# EAGLE board eCVT 507 rev0 (EAGLE 9.5.0)
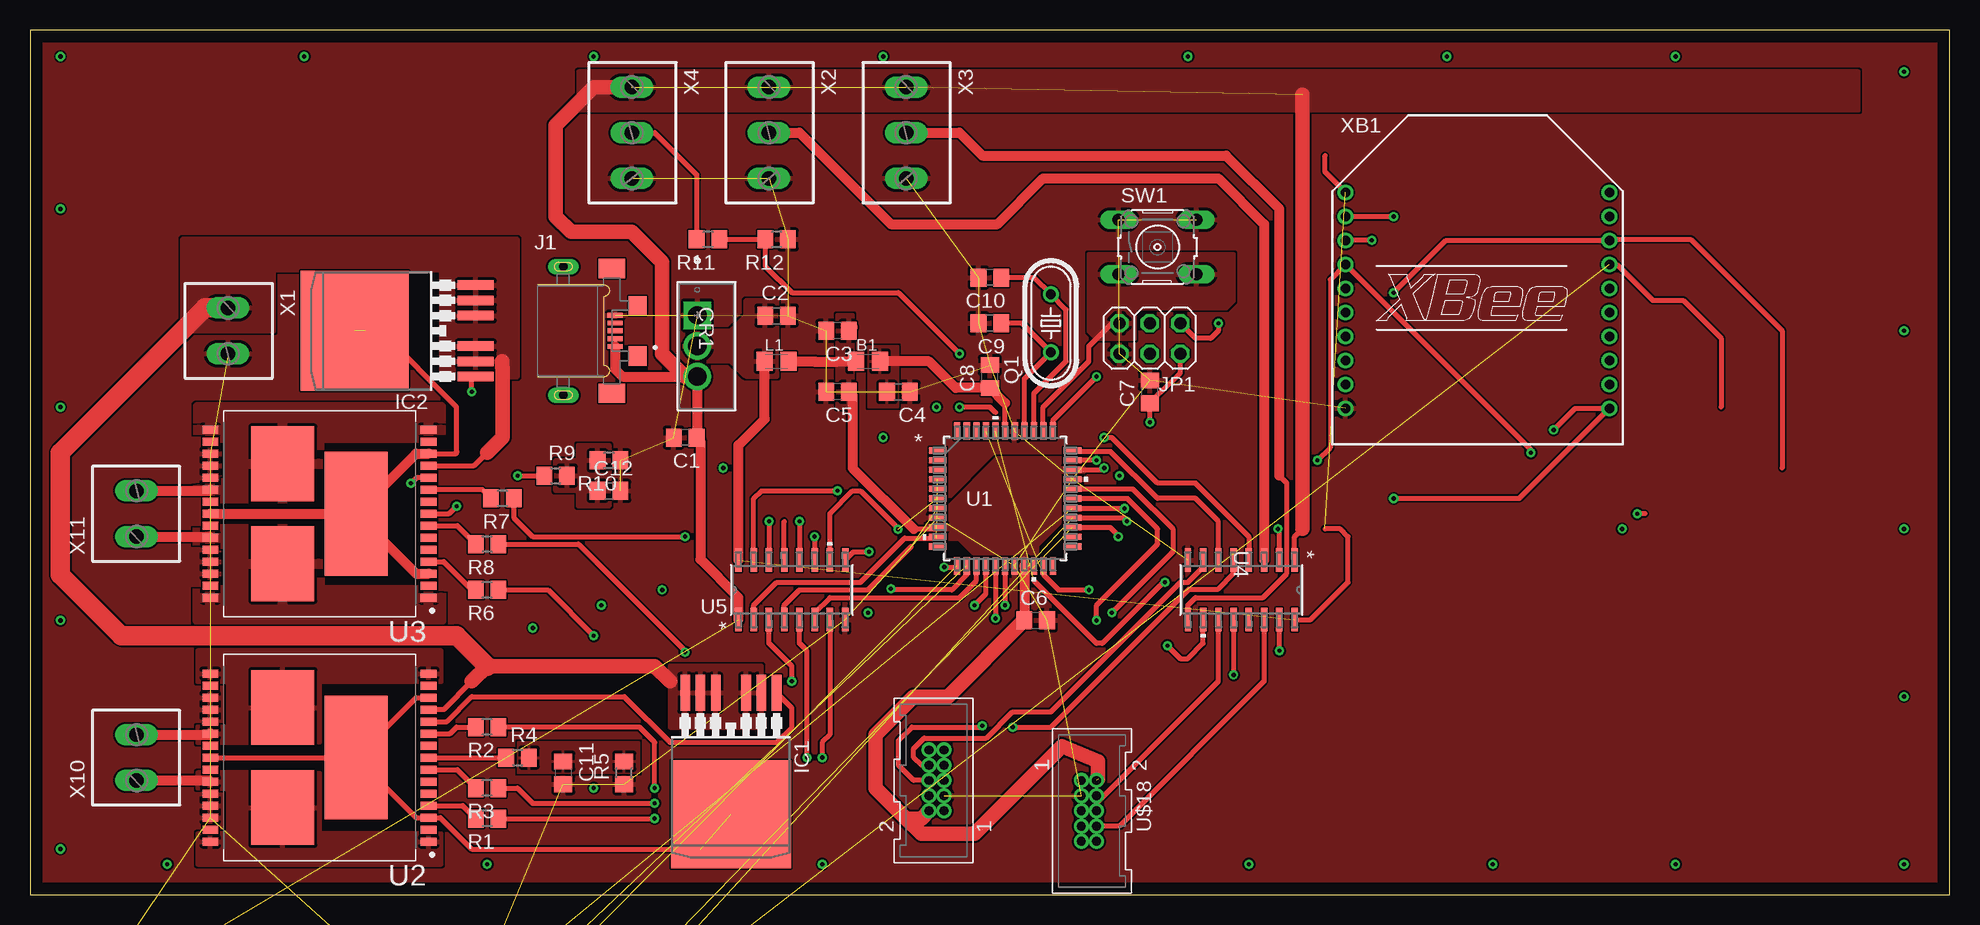
[diagram p0: board, top side]
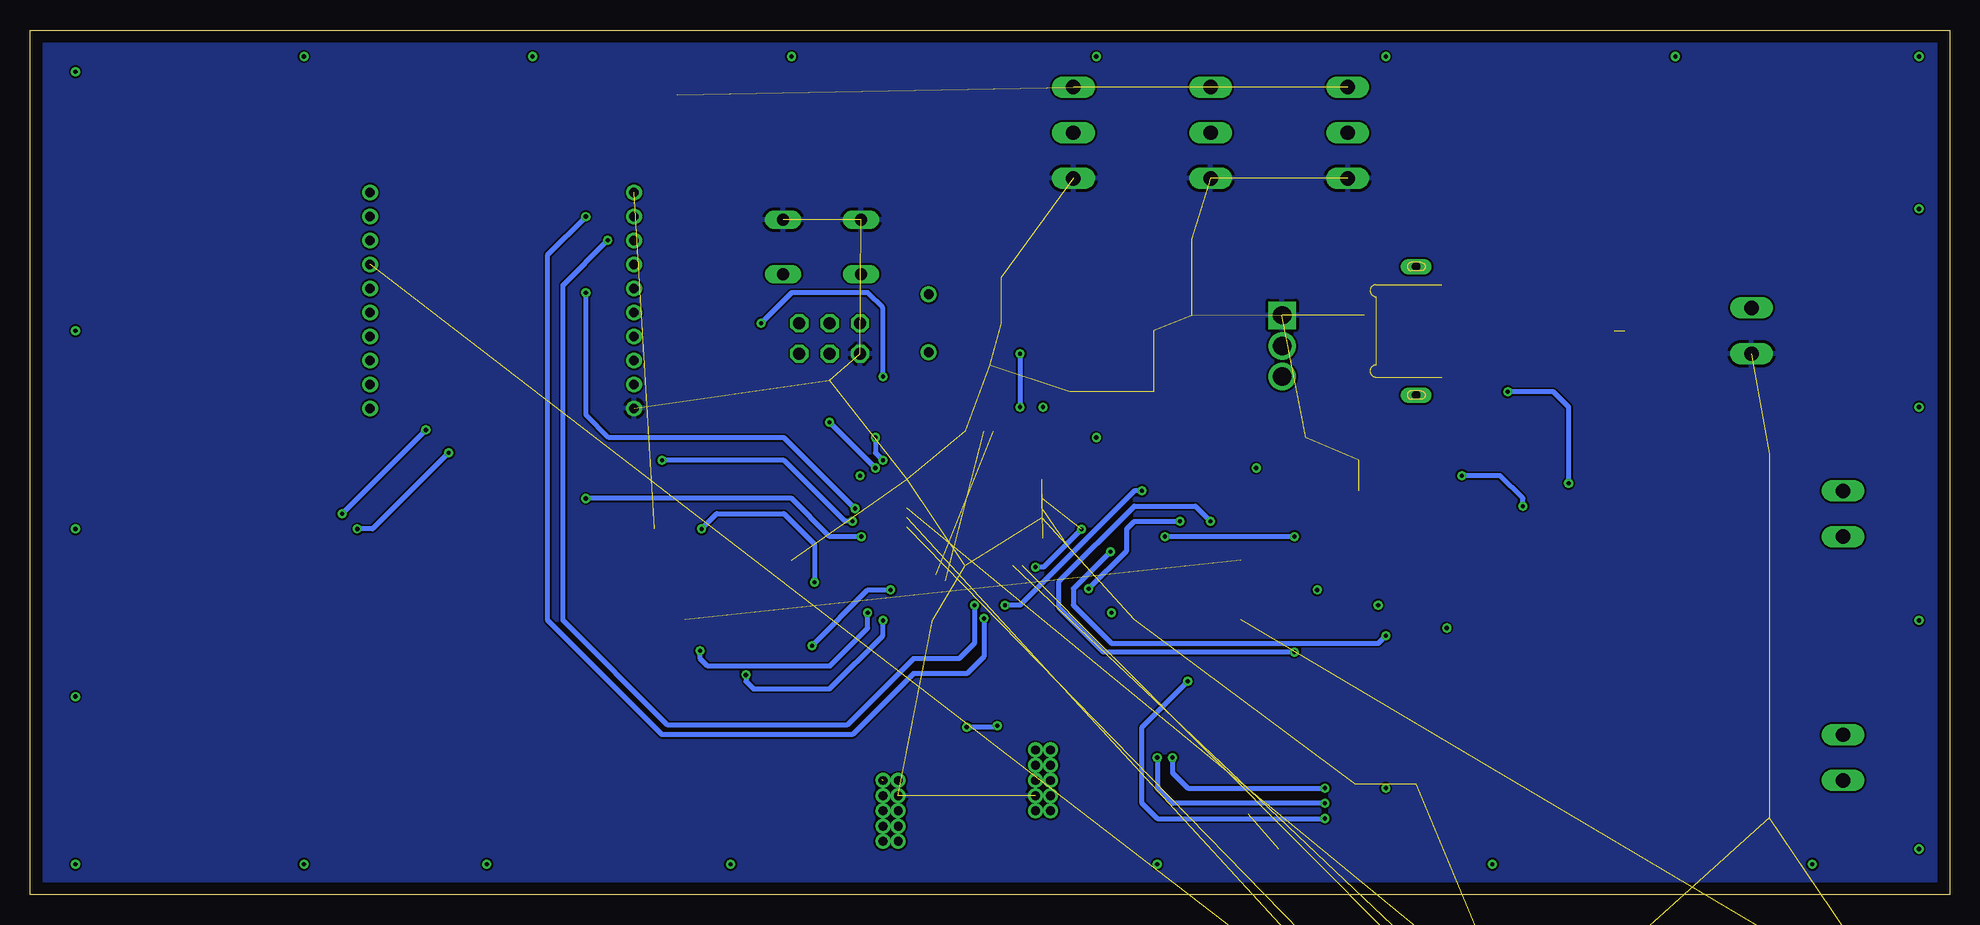
[diagram p1: board, bottom side, seen from below]

Size 160 x 72.06 mm. Coordinates in mm from the lower left corner, seen from the top.
Outline: 0,0 160,0 160,72.06 0,72.06 0,0
Copper layers (1*16): Top 0.035mm / dielectric 1.5mm / Bottom 0.035mm
Design rules "default": minimum track width 6mil, minimum drill 0.35mm, track to track 6mil, track to pad 6mil, pad to pad 6mil, via to via 6mil, smd to smd 6mil, copper to edge 40mil, drill to drill 6mil, minimum pad ring 10mil, minimum via ring 8mil, stop-mask expansion 4mil, vias tented up to drill 0mil, thermal gap 10mil

## Footprints (pad centres in the part's own frame; a part is rotated, then mirrored left to right if it is on the bottom)
0805 = smd 1.3 x 1.6: 1 -1,0; 2 1,0
C0805 = smd 1.3 x 1.5: 1 -0.95,0; 2 0.95,0
TO-220 = drill 1.524 pad 2.032 square: 1 -5.105,-1.524 | drill 1.524 pad 2.032: 2 -2.54,-1.524; 3 0,-1.524
PG-TO263-7-3 = smd 0.8 x 3: 1 -3.81,-9.207; 2 -2.54,-9.207; 3 -1.27,-9.207; 5 1.27,-9.207; 6 2.54,-9.207; 7 3.81,-9.207 | smd 10 x 9: 8 0,0.895
CUI_UJ2-MIBH-4-MSMT = smd 1.25 x 0.4: 1 4.325,-1.3; 2 4.325,-0.65; 3 4.325,0; 4 4.325,0.65; 5 4.325,1.3 | drill 0.7 pad 1.3 long: S1 0,5.35; S4 0,-5.35 | smd 2.2 x 1.6: S2 4.05,5.2; S5 4.05,-5.2 | smd 1.5 x 1.6: S3 6.2,2.1; S6 6.2,-2.1
2X03 = drill 1.016 octagon: 1 -2.54,-1.27; 2 -2.54,1.27; 3 0,-1.27; 4 0,1.27; 5 2.54,-1.27; 6 2.54,1.27
HC49/S = drill 0.813: 1 -2.413,0; 2 2.413,0
R0805 = smd 1.3 x 1.5: 1 -0.95,0; 2 0.95,0
B3F-10XX = drill 1.016 long: 1 -3.251,2.261; 2 3.251,2.261; 3 -3.251,-2.261; 4 3.251,-2.261
44A = smd 1.473 x 0.508: 1 -5.613,4; 2 -5.613,3.2; 3 -5.613,2.4; 4 -5.613,1.6; 5 -5.613,0.8; 6 -5.613,0; 7 -5.613,-0.8; 8 -5.613,-1.6; 9 -5.613,-2.4; 10 -5.613,-3.2; 11 -5.613,-4; 23 5.613,-4; 24 5.613,-3.2; 25 5.613,-2.4; 26 5.613,-1.6; 27 5.613,-0.8; 28 5.613,0; 29 5.613,0.8; 30 5.613,1.6; 31 5.613,2.4; 32 5.613,3.2; 33 5.613,4 | smd 0.508 x 1.473: 12 -4,-5.613; 13 -3.2,-5.613; 14 -2.4,-5.613; 15 -1.6,-5.613; 16 -0.8,-5.613; 17 0,-5.613; 18 0.8,-5.613; 19 1.6,-5.613; 20 2.4,-5.613; 21 3.2,-5.613; 22 4,-5.613; 34 4,5.613; 35 3.2,5.613; 36 2.4,5.613; 37 1.6,5.613; 38 0.8,5.613; 39 0,5.613; 40 -0.8,5.613; 41 -1.6,5.613; 42 -2.4,5.613; 43 -3.2,5.613; 44 -4,5.613
IC_VNH5019ATR-E = smd 1.3 x 0.665: 1 -9.1,7; 2 -9.1,6; 3 -9.1,5; 4 -9.1,4; 5 -9.1,3; 6 -9.1,2; 7 -9.1,1; 8 -9.1,0; 9 -9.1,-1; 10 -9.1,-2; 11 -9.1,-3; 12 -9.1,-4; 13 -9.1,-5; 14 -9.1,-6; 15 -9.1,-7; 16 9.1,-7; 17 9.1,-6; 18 9.1,-5; 19 9.1,-4; 20 9.1,-3; 21 9.1,-2; 22 9.1,-1; 23 9.1,0; 24 9.1,1; 25 9.1,2; 26 9.1,3; 27 9.1,4; 28 9.1,5; 29 9.1,6; 30 9.1,7 | smd 5.25 x 10.3: HS1 -3.05,0 | smd 5.25 x 6.23: HS2 3.05,4.165; HS3 3.05,-4.165
SOIC-16 = smd 1.956 x 0.533: 1 -2.477,4.445; 2 -2.477,3.175; 3 -2.477,1.905; 4 -2.477,0.635; 5 -2.477,-0.635; 6 -2.477,-1.905; 7 -2.477,-3.175; 8 -2.477,-4.445; 9 2.477,-4.445; 10 2.477,-3.175; 11 2.477,-1.905; 12 2.477,-0.635; 13 2.477,0.635; 14 2.477,1.905; 15 2.477,3.175; 16 2.477,4.445
TEENSY_3.5/3.6_BASIC = drill 0.965: 0/RX -25.4,-7.62; 1/TX -22.86,-7.62; 2 -20.32,-7.62; 3/CANTX -17.78,-7.62; 3V3 7.62,-7.62; 3V3_LO -22.86,7.62; 4/CANRX -15.24,-7.62; 5 -12.7,-7.62; 6 -10.16,-7.62; 7 -7.62,-7.62; 8 -5.08,-7.62; 9/CS -2.54,-7.62; 10/CS 0,-7.62; 11/MOSI 2.54,-7.62; 12/MISO 5.08,-7.62; 13/SCK 5.08,7.62; 14/A0 2.54,7.62; 15/A1 0,7.62; 16/A2 -2.54,7.62; 17/A3 -5.08,7.62; 18/A4/SDA -7.62,7.62; 19/A5/SCL -10.16,7.62; 20/A6 -12.7,7.62; 21/A7 -15.24,7.62; 21/DAC0 12.7,7.62; 22/A8 -17.78,7.62; 23/A9 -20.32,7.62; 24 10.16,-7.62; 25 12.7,-7.62; 26 15.24,-7.62; 27 17.78,-7.62; 28 20.32,-7.62; 29 22.86,-7.62; 30 25.4,-7.62; 31/A12 27.94,-7.62; 32/A13 30.48,-7.62; 33/A14 30.48,7.62; 34/A15 27.94,7.62; 35/A16 25.4,7.62; 36/A17 22.86,7.62; 37/A18 20.32,7.62; 38/A19 17.78,7.62; 39/A20 15.24,7.62; A10 -17.78,5.08; A11 -15.24,5.08; A22/DAC1 10.16,7.62; AGND -25.4,7.62; AREF -20.32,5.08; GND -27.94,-7.62; GND2 7.62,7.62; VIN -27.94,7.62; VUSB -25.4,5.08
SHF-105-01-X-D-TH = drill 0.737 pad 1.067: 1 -2.54,-0.635; 2 -2.54,0.635; 3 -1.27,-0.635; 4 -1.27,0.635; 5 0,-0.635; 6 0,0.635; 7 1.27,-0.635; 8 1.27,0.635; 9 2.54,-0.635; 10 2.54,0.635
2POL381 = drill 1.2 long: 1 -1.905,0; 2 1.905,0
3POL381 = drill 1.2 long: 1 -3.81,0; 2 0,0; 3 3.81,0
XBEE = drill 0.8 pad 1.27: 1 -11,9; 2 -11,7; 3 -11,5; 4 -11,3; 5 -11,1; 6 -11,-1; 7 -11,-3; 8 -11,-5; 9 -11,-7; 10 -11,-9; 11 11,-9; 12 11,-7; 13 11,-5; 14 11,-3; 15 11,-1; 16 11,1; 17 11,3; 18 11,5; 19 11,7; 20 11,9

## Placement (x,y rotation side)
B1  220@100MHz  [0805]  69.85,44.45 0 top
C1  100nF  [C0805]  54.61,38.1 180 top
C2  10uF  [C0805]  62.23,48.26 0 top
C3  10uF  [C0805]  67.31,46.99 180 top
C4  10uF  [C0805]  72.39,41.91 0 top
C5  0.1uF  [C0805]  67.31,41.91 180 top
C6  0.1uF  [C0805]  83.82,22.86 0 top
C7  0.1uF  [C0805]  93.34,41.91 90 top
C8  0.1uF  [C0805]  80.01,43.18 90 top
C9  30pF  [C0805]  80.01,47.62 180 top
C10  30pF  [C0805]  80.01,51.44 180 top
C11  [C0805]  44.45,10.16 270 top
C12  [C0805]  48.26,33.66 0 top
CR1  LD1117V33  [TO-220]  57.15,43.18 270 top
IC1  IPB180N06S4-H1  [PG-TO263-7-3]  58.42,7.62 180 top
IC2  IPB180N06S4-H1  [PG-TO263-7-3]  27.94,46.99 90 top
J1  UJ2-MIBH-4-MSMT  [CUI_UJ2-MIBH-4-MSMT]  44.45,46.99 0 top
JP1  [2X03]  93.34,46.35 180 top
L1  10uH  [0805]  62.23,44.45 0 top
Q1  16MHz 18pF  [HC49/S]  85.09,47.62 90 top
R1  1K  [R0805]  38.1,6.35 180 top
R2  1K  [R0805]  38.1,13.97 180 top
R3  1K  [R0805]  38.1,8.89 180 top
R4  10K  [R0805]  40.64,11.43 0 top
R5  1.5K  [R0805]  49.53,10.16 90 top
R6  1K  [R0805]  38.1,25.4 180 top
R7  1K  [R0805]  39.37,33.02 180 top
R8  1K  [R0805]  38.1,29.21 180 top
R9  10K  [R0805]  43.81,34.92 0 top
R10  1.5K  [R0805]  48.26,36.2 180 top
R11  1.7K  [R0805]  56.52,54.61 180 top
R12  3.3K  [R0805]  62.23,54.61 180 top
SW1  SW  [B3F-10XX]  93.98,53.98 0 top
U1  ATXMEGA128A4U-AU  [44A]  81.28,33.02 0 top
U2  VNH5019ATR-E  [IC_VNH5019ATR-E]  24.13,11.43 180 top
U3  VNH5019ATR-E  [IC_VNH5019ATR-E]  24.13,31.75 180 top
U4  MC14504BDR2G  [SOIC-16]  100.97,25.4 270 top
U5  MC14504BDR2G  [SOIC-16]  63.5,25.4 90 top
U$3  TEENSY_3.5/3.6_BASIC  [TEENSY_3.5/3.6_BASIC]  27.94,-19.68 0 top  (outside the outline)
U$18  SHF-105-01-X-D-TH  [SHF-105-01-X-D-TH]  88.27,6.99 270 top
U$19  SHF-105-01-X-D-TH  [SHF-105-01-X-D-TH]  75.56,9.53 90 top
X1  [2POL381]  16.51,46.99 270 top
X2  [3POL381]  61.59,63.5 270 top
X3  [3POL381]  73.03,63.5 270 top
X4  [3POL381]  50.16,63.5 270 top
X10  [2POL381]  8.89,11.43 90 top
X11  [2POL381]  8.89,31.75 90 top
XB1  XBEE  [XBEE]  120.65,49.53 0 top

## Library data of the parts
B1 L1 X1-X4 X10 X11 = ME507
C1-C12 = rcl; SPICEPREFIX: C
CR1 = LD1117V33; MANUFACTURER_PART_NUMBER: LD1117V33; VENDOR: STMicroelectronics
IC1 IC2 = infineon
J1 = UJ2-MIBH-4-MSMT; CUI_PURCHASE_URL: https://www.cuidevices.com/product/interconnect/connectors/usb-connectors/uj2-mibh-4-msmt?utm_source=snapeda.com&utm_medium=referral&utm_campaign=snapedaBOM; DESCRIPTION: Micro B, USB 2.0, 1.8 A, Right Angle, Mid Mount _SMT_, USB Receptacle; DIGI-KEY_PART_NUMBER: 102-4008-1-ND; DIGI-KEY_PURCHASE_URL: https://www.digikey.com/product-detail/en/cui-devices/UJ2-MIBH-4-MSMT-TR/102-4008-1-ND/6187930?utm_source=snapeda&utm_medium=aggregator&utm_campaign=symbol; MF: CUI Devices; MP: UJ2-MIBH-4-MSMT-TR; PACKAGE: None
JP1 = pinhead
Q1 = crystal; OC_FARNELL: 1667008; OC_NEWARK: unknown
R1-R12 = rcl; SPICEPREFIX: R
SW1 = ME507; MPN: B3F-1000; OC_FARNELL: 176432; OC_NEWARK: 36M3542
U1 = XMEGA; MANUFACTURER_PART_NUMBER: ATXMEGA128A4UAU; VENDOR: Atmel
U2 U3 = VNH5019ATR-E; DESCRIPTION: Motor / Motion / Ignition Controllers & Drivers Automotive h-Bridge 18mohm 30a 41v Vcc; DIGI-KEY_PART_NUMBER: 497-13073-1-ND; DIGI-KEY_PURCHASE_URL: https://www.digikey.com/product-detail/en/stmicroelectronics/VNH5019ATR-E/497-13073-1-ND/3455763?utm_source=snapeda&utm_medium=aggregator&utm_campaign=symbol; MF: STMicroelectronics; MP: VNH5019ATR-E; PACKAGE: SOP-30 STMicroelectronics
U4 U5 = MC14504BDR2G; MANUFACTURER_PART_NUMBER: MC14504BDR2G; VENDOR: ON Semiconductor
U$3 = Teensy356
U$18 U$19 = SHF-105-01-X-D-TH; DESCRIPTION: SHF Series .050 Shrouded Terminal Strip For FFSD; DIGI-KEY_PART_NUMBER: SAM10711-ND; DIGI-KEY_PURCHASE_URL: https://www.digikey.com/product-detail/en/samtec-inc/SHF-105-01-L-D-TH/SAM10711-ND/6561671?utm_source=snapeda&utm_medium=aggregator&utm_campaign=symbol; MF: Samtec; MP: SHF-105-01-L-D-TH; PACKAGE: None
XB1 = xbee; MPN: XBP24-Z7UIT-004; OC_FARNELL: 1751799; OC_NEWARK: 34R5507

## Nets
+3V3: C2.1 CR1.2 L1.1 U4.16 U5.16 XB1.1
+5V: C1.1 CR1.3 J1.1 U4.1 U5.1 U$3.VIN X2.1 X3.1 X4.1
+12V: IC1.2 IC1.3 IC1.5 IC1.6 IC1.7 IC2.2 IC2.3 IC2.5 IC2.6 IC2.7 U2.12 U3.12 X1.1
AVCC: B1.2 C4.1 C8.1 U1.39
BRAKE_PRESSURE: R11.1 R12.2
BRAKE_PRESSURE_3V3: U1.42
ENGINE_SPEED: U4.3 X2.2
ENGINE_SPEED_3V3: U1.40 U4.2
GND: C1.2 C2.2 C3.2 C4.2 C5.2 C6.2 C7.2 C8.2 C9.2 C10.2 C11.2 C12.2 CR1.1 J1.5 JP1.6 R5.1 R10.1 R12.1 SW1.1 SW1.2 U1.8 U1.18 U1.30 U1.38 U2.18 U2.19 U2.20 U2.26 U2.27 U2.28 U3.18 U3.19 U3.20 U3.26 U3.27 U3.28 U4.8 U5.8 U$3.AGND U$3.GND U$3.GND2 U$18.3 U$19.3 X1.2 X2.3 X3.3 X4.3 XB1.10
MISO: U1.26 U$3.12/MISO XB1.4
MOSI: U1.25 U$3.11/MOSI XB1.11
N$1: U1.22
N$3: U1.43
N$4: U1.44
N$5: R1.2 U2.4
N$6: U1.1
N$7: JP1.3
N$8: U$3.0/RX
N$9: U$3.1/TX
N$10: U1.2
N$11: XB1.5
N$12: R2.2 U2.10
N$13: R4.1 U2.8
N$14: JP1.4
N$15: C11.1 R4.2 R5.2
N$16: U2.15 U2.16 U2.21 U2.HS3 X10.2
N$17: U2.1 U2.25 U2.30 U2.HS2 X10.1
N$18: IC1.1 U2.11
N$19: R3.2 U2.7
N$20: XB1.6
N$21: XB1.9
N$22: U1.3
N$23: U1.24
N$27: IC1.8 U2.3 U2.13 U2.23 U2.HS1
N$28: R6.2 U3.4
N$29: R7.2 U3.10
N$30: R8.2 U3.7
N$31: R9.1 U3.8
N$32: C12.1 R9.2 R10.2
N$33: U3.15 U3.16 U3.21 U3.HS3 X11.2
N$34: U3.1 U3.25 U3.30 U3.HS2 X11.1
N$35: IC2.1 U3.11
N$36: IC2.8 U3.3 U3.13 U3.23 U3.HS1
N$37: U$18.1
N$38: U$19.1
N$39: R11.2 X4.2
N$40: XB1.14
N$41: XB1.12
N$42: XB1.13
N$43: XB1.15
N$44: XB1.16
N$45: U1.23
N$46: U2.6
N$47: XB1.19
N$48: U1.10
N$49: U5.13
N$50: XB1.20
N$77: U$18.5
N$78: U$18.7
N$79: U$18.9
N$80: U$18.4
N$81: U$18.10
N$82: U$19.5
N$83: U$19.7
N$84: U$19.9
N$85: U$19.4
N$86: U$19.10
N$87: U$3.2
N$88: U$3.3/CANTX
N$89: U$3.4/CANRX
N$90: U$3.5
N$91: U$3.6
N$92: U$3.9/CS
N$93: U$3.3V3
N$94: U$3.24
N$95: U$3.25
N$96: U$3.26
N$97: U$3.27
N$98: U$3.28
N$99: U$3.29
N$100: U$3.30
N$101: U$3.31/A12
N$102: U$3.32/A13
N$103: U$3.33/A14
N$104: U$3.34/A15
N$105: U$3.35/A16
N$106: U$3.36/A17
N$107: U$3.37/A18
N$108: U$3.38/A19
N$109: U$3.39/A20
N$110: U$3.21/DAC0
N$111: U$3.A22/DAC1
N$114: U$3.14/A0
N$115: U$3.15/A1
N$116: U$3.16/A2
N$117: U$3.17/A3
N$118: U$3.18/A4/SDA
N$119: U$3.19/A5/SCL
N$120: U$3.20/A6
N$121: U$3.21/A7
N$122: U$3.22/A8
N$123: U$3.23/A9
N$124: U$3.3V3_LO
N$128: U1.11
N$129: U$3.A11
N$130: U$3.A10
N$131: U$3.AREF
N$132: U$3.VUSB
N$133: U3.6
PDI_DATA: JP1.1 U1.34
PENC_INA: U4.11 U$18.6
PENC_INA_3V3: U1.28 U4.12
PENC_INB: U4.14 U$18.8
PENC_INB_3V3: U1.29 U4.15
PMOT_INA: R1.1 U5.3
PMOT_INA_3V3: U1.4 U5.2
PMOT_INB: R2.1 U5.5
PMOT_INB_3V3: U1.5 U1.7 U5.4
PMOT_PWM: R3.1 U5.7
PMOT_PWM_3V3: U1.14 U5.6
RESET/PDI_CLK: JP1.5 SW1.3 SW1.4 U1.35
RWHEEL_SPEED: U4.9 X3.2
RWHEEL_SPEED_3V3: U1.41 U4.10
SCK: U1.27 U$3.13/SCK XB1.18
SENC_INA: U4.5 U$19.6
SENC_INA_3V3: U1.32 U4.4
SENC_INB: U4.7 U$19.8
SENC_INB_3V3: U1.33 U4.6
SMOT_INA: R6.1 U5.9
SMOT_INA_3V3: U1.6 U5.10
SMOT_INB: R7.1 U5.11
SMOT_INB_3V3: U5.12
SMOT_PWM: R8.1 U5.14
SMOT_PWM_3V3: U1.15 U5.15
SS: U$3.10/CS XB1.17
TEENSY_RX: U1.12 U$3.8
TEENSY_SS: U1.20
TEENSY_TX: U1.13 U$3.7
VCC: B1.1 C3.1 C5.1 C6.1 C7.1 JP1.2 L1.2 U1.9 U1.19 U1.31 U$18.2 U$19.2
XBEE_RX: U1.16 XB1.2
XBEE_SS: U1.21
XBEE_TX: U1.17 XB1.3
XTAL1: C9.1 Q1.1 U1.37
XTAL2: C10.1 Q1.2 U1.36

## Tracks (layer width: path | path; a pad name or v marks a point on that pad's centre or on a via)
+3V3  (2 unrouted)
  Top 0.406: U4.16 106.74,22.92 109.86,26.04 109.86,29.84 109.22,30.48 107.95,30.48 | XB1.1 107.95,60.23 107.95,61.59
  Top 0.813: U5.16 59.05,37.47 61.23,39.64 L1.1
  pour Top: 54.61,46.99 58.42,46.99 59.69,48.26 59.69,49.53 62.23,49.53 62.23,43.18 59.69,43.18 58.42,44.45 54.61,44.45
+5V  (4 unrouted)
  Top 0.406: U4.1 105.41,29.84 106.05,30.48
  Top 0.813: J1.1 48.77,43.78 49.38,43.18 CR1.3 55.63,38.17 C1.1 55.88,37.78 55.88,27.94 59.05,24.77 U5.1
  Top 1.219: CR1.3 54.61,43.18 52.7,45.09 52.7,52.7 50.16,55.24 45.09,55.24 43.81,56.52 43.81,64.14 46.99,67.31 X4.1 | 106.05,30.48 106.05,66.67
  pour Top: 45.72,68.58 45.72,65.41 152.4,65.41 152.4,68.58
+12V
  Top 0.406: U2.12 34.48,15.43 36.83,17.78 | 53.34,17.78 53.66,17.78 | U3.12 37.02,35.75 38.1,36.83
  Top 1.219: 53.34,17.78 52.07,19.05 38.1,19.05 36.83,17.78 | 39.37,44.45 39.37,43.94 39.41,43.9 39.41,38.14 38.1,36.83
  Top 1.626: X1.1 14.61,48.9 2.54,36.83 2.54,26.67 7.62,21.59 35.56,21.59 38.1,19.05
  pour Top: 53.34,19.05 53.34,13.97 60.96,13.97 60.96,19.05
  pour Top: 12.7,46.99 20.32,46.99 20.32,52.07 34.29,52.07 34.29,43.18 40.64,43.18 40.64,54.61 12.7,54.61
AVCC
  Top 0.406: U1.39 81.28,40.96
  Top 0.813: B1.2 74.93,44.45 77.15,42.23 C8.1 81.28,40.96
  pour Top: 69.85,40.64 72.39,40.64 72.39,45.72 69.85,45.72
BRAKE_PRESSURE  (via drill 0.35)
  Top 0.406: R11.1 R12.2 61.28,52.38 63.5,50.16 72.39,50.16 v77.47,45.09 | 80.48,40.17 80.01,40.64 v77.47,40.64
  Bottom 0.406: v77.47,45.09 v77.47,40.64
ENGINE_SPEED
  Top 0.813: X2.2 64.14,63.5 71.75,55.88 80.64,55.88 84.45,59.69 99.06,59.69 102.87,55.88 U4.3
ENGINE_SPEED_3V3  (via drill 0.35)  (1 unrouted)
  Top 0.406: 83.68,26.18 88.9,20.95 89.38,20.95 94.46,26.04 v94.61,26.04 | U4.2 104.14,30.48 v104.03,30.48
  Bottom 0.406: v104.03,30.48 102.76,31.75 97.16,31.75 94.61,29.21 v94.61,26.04
GND  (47 unrouted)
  pour Top (rank 6): -1.27,72.39 -1.27,-1.27 161.29,-1.27 161.29,72.39
  pour Bottom: 0,72.39 161.29,72.39 161.29,-1.27 -2.54,-1.27 -2.54,69.85
MISO  (via drill 0.35)  (1 unrouted)
  Top 0.406: U1.26 91.14,31.42 v91.44,31.11 | v125.09,36.83 125.09,37.09 XB1.4 108.38,51.26 108.38,37.26 v107.31,36.2
  Bottom 0.406: v91.44,31.11 92.08,31.11 97.16,36.2 v107.31,36.2 | v125.09,36.83 131.44,30.48 v132.72,30.48
MOSI  (via drill 0.35)  (1 unrouted)
  Top 0.406: U1.25 90.03,30.62 90.81,29.84 v90.71,29.84 | v113.67,33.02 124.14,33.02 XB1.11 128.79,40.53 v127,38.73 | 134.62,31.75 v133.99,31.75
  Bottom 0.406: v90.71,29.84 93.34,29.84 96.52,33.02 v113.67,33.02 | v133.99,31.75 v127,38.73
N$5
  Top 0.406: U2.4 36.07,7.43 R1.2
N$12
  Top 0.406: U2.10 35.02,13.43 35.56,13.97 R2.2
N$13
  Top 0.406: U2.8 R4.1
N$15
  pour Top: 40.64,12.7 40.64,10.16 50.8,10.16 50.8,12.7
N$16
  Top 0.813: X10.2 14.94,13.34 U2.21
  pour Top: 13.97,20.32 13.97,17.78 16.51,17.78 16.51,13.97 13.97,13.97 13.97,12.7 24.13,12.7 24.13,17.78 34.29,17.78 34.29,20.32
N$17
  Top 0.406: 14.94,9.53 U2.25
  Top 0.813: X10.1 14.94,9.53
  pour Top: 13.97,10.16 13.97,8.89 16.51,8.89 16.51,5.08 13.97,5.08 13.97,2.54 34.29,2.54 34.29,5.08 24.13,5.08 24.13,10.16
N$18
  Top 0.406: 62.23,16.51 IC1.1 63.5,15.56 63.5,13.97 62.23,12.7 53.34,12.7 49.53,16.51 36.83,16.51 34.75,14.43 U2.11
N$19
  Top 0.406: U2.7 35.61,10.43 R3.2
N$27  (1 unrouted)
  Top 0.152: 34.21,6.43 34.29,6.35
  Top 0.406: 34.21,6.43 U2.3 32.18,6.43 U2.HS1 | 34.29,6.35 36.83,3.81 55.88,3.81 | U2.23 U2.HS1 | U2.HS1 32.18,16.43 U2.13
N$28
  Top 0.406: U3.4 34.48,27.75 36.83,25.4 R6.2
N$29
  Top 0.406: R7.2 37.69,33.75 U3.10
N$30
  Top 0.406: U3.7 35.61,30.75 R8.2
N$31  (via drill 0.35)
  Top 0.406: U3.8 34.92,31.75 v35.56,32.38 | v40.64,34.92 R9.1
  Bottom 0.406: v35.56,32.38 35.56,33.02 37.47,34.92 v40.64,34.92
N$32
  pour Top: 43.81,36.2 45.72,36.2 45.72,37.47 48.26,37.47 48.26,32.38 45.72,32.38 45.72,33.66 43.81,33.66
N$33
  Top 0.813: X11.2 14.94,33.66 U3.21
  pour Top: 13.97,39.37 13.97,38.1 16.51,38.1 16.51,34.29 13.97,34.29 13.97,33.02 24.13,33.02 24.13,38.1 34.29,38.1 34.29,40.64 13.97,40.64
N$34
  Top 0.813: X11.1 14.94,29.84 U3.25
  pour Top: 13.97,30.48 24.13,30.48 24.13,25.4 34.29,25.4 34.29,22.86 13.97,22.86 13.97,25.4 16.51,25.4 16.51,29.21 13.97,29.21
N$35  (via drill 0.35)
  Top 0.406: U3.11 32.21,34.75 v31.75,34.29 | v36.83,41.91 36.83,42.86 IC2.1
  Bottom 0.406: v31.75,34.29 31.75,40.64 33.02,41.91 v36.83,41.91
N$36  (1 unrouted)
  Top 0.406: U3.13 35.53,36.75 35.6,36.92 35.56,36.96 35.56,40.64 29.21,46.99 27.94,46.99
  Top 0.813: U3.23 U3.HS1 | U3.HS1 32.18,26.75 U3.3 | U3.HS1 32.18,36.75 U3.13
N$39
  Top 0.406: X4.2 52.07,63.5 55.56,60.01 R11.2
N$49
  Top 0.406: U5.13 62.87,31.11
N$51  (via drill 0.35)
  other vias: 46.99,8.89
N$52  (via drill 0.35)
  other vias: 38.1,2.54
N$53  (via drill 0.35)
  other vias: 66.04,2.54
N$54  (via drill 0.35)
  other vias: 101.6,2.54
N$55  (via drill 0.35)
  other vias: 121.92,2.54
N$56  (via drill 0.35)
  other vias: 137.16,2.54
N$57  (via drill 0.35)
  other vias: 156.21,2.54
N$58  (via drill 0.35)
  other vias: 156.21,16.51
N$59  (via drill 0.35)
  other vias: 156.21,30.48
N$60  (via drill 0.35)
  other vias: 156.21,46.99
N$61  (via drill 0.35)
  other vias: 156.21,68.58
N$62  (via drill 0.35)
  other vias: 137.16,69.85
N$63  (via drill 0.35)
  other vias: 118.11,69.85
N$64  (via drill 0.35)
  other vias: 96.52,69.85
N$65  (via drill 0.35)
  other vias: 71.12,69.85
N$66  (via drill 0.35)
  other vias: 46.99,69.85
N$67  (via drill 0.35)
  other vias: 22.86,69.85
N$68  (via drill 0.35)
  other vias: 2.54,69.85
N$69  (via drill 0.35)
  other vias: 2.54,57.15
N$70  (via drill 0.35)
  other vias: 2.54,40.64
N$71  (via drill 0.35)
  other vias: 2.54,22.86
N$72  (via drill 0.35)
  other vias: 2.54,3.81
N$73  (via drill 0.35)
  other vias: 11.43,2.54
N$74  (via drill 0.35)
  other vias: 71.12,38.1
N$75  (via drill 0.35)
  other vias: 75.56,40.64
N$76  (via drill 0.35)
  other vias: 57.78,35.56
N$112  (via drill 0.35)
  other vias: 52.7,25.4
N$113  (via drill 0.35)
  other vias: 47.62,24.13
N$125  (via drill 0.35)
  other vias: 41.91,22.23
N$126  (via drill 0.35)
  other vias: 90.81,34.92
N$127  (via drill 0.35)
  other vias: 69.85,23.5
PDI_DATA  (via drill 0.35)
  Top 0.406: U1.34 85.28,39.56 v88.9,43.18 | v99.06,47.62 99.06,46.99 98.42,46.35 97.16,46.35 JP1.1
  Bottom 0.406: v88.9,43.18 88.9,48.9 90.17,50.16 96.52,50.16 v99.06,47.62
PENC_INA
  Top 0.406: U$18.6 88.9,7.62 99.06,17.78 U4.11
PENC_INA_3V3  (via drill 0.35)
  Top 0.406: U4.12 v100.33,18.32 | U1.28 91.44,33.02 93.98,30.48 93.98,29.21 88.9,24.13 v88.9,22.86
  Bottom 0.406: v100.33,18.32 100.33,17.78 99.69,17.14 93.34,17.14 88.9,21.59 v88.9,22.86
PENC_INB
  Top 0.406: U4.14 102.87,17.78 90.81,5.71 U$18.8
PENC_INB_3V3  (via drill 0.35)
  Top 0.406: U1.29 91.91,33.82 95.25,30.48 95.25,28.57 v90.17,23.5 | v104.14,20.32 U4.15
  Bottom 0.406: v104.14,20.32 104.14,19.68 103.5,19.05 93.34,19.05 90.17,22.23 v90.17,23.5
PMOT_INA  (via drill 0.35)
  Top 0.406: R1.1 v52.07,6.35 | v63.5,17.78 63.5,19.05 61.59,20.95 U5.3
  Bottom 0.406: v52.07,6.35 66.04,6.35 67.31,7.62 67.31,13.97 v63.5,17.78
PMOT_INA_3V3  (1 unrouted)
  Top 0.406: 75.56,29.72 72.9,29.72 69.22,26.04 62.23,26.04 60.33,24.13 U5.2
PMOT_INB  (via drill 0.35)
  Top 0.406: v64.77,11.43 64.77,20.32 64.14,20.95 U5.5 | v52.07,8.89 52.07,12.7 50.8,13.97 R2.1
  Bottom 0.406: v64.77,11.43 64.77,10.16 63.5,8.89 v52.07,8.89
PMOT_INB_3V3  (2 unrouted)
  Top 0.406: U5.4 62.87,24.13 64.14,25.4 69.85,25.4 73.47,29.02
PMOT_PWM  (via drill 0.35)
  Top 0.406: R3.1 40.64,8.89 41.91,7.62 v52.07,7.62 | U5.7 66.67,13.34 66.04,12.7 v66.04,11.43
  Bottom 0.406: v52.07,7.62 64.77,7.62 66.04,8.89 v66.04,11.43
PMOT_PWM_3V3
  Top 0.406: U1.14 78.88,26.18 77.47,24.77 66.67,24.77 65.41,23.5 U5.6
RESET/PDI_CLK
  Top 0.406: U1.35 84.45,38.66 84.45,40.64 88.27,44.45 88.27,45.72 90.17,47.62
  pour Top: 88.9,46.35 92.08,46.35 92.08,48.9 99.69,48.9 100.33,49.53 100.33,53.34 88.27,53.34 88.27,46.99
RWHEEL_SPEED
  Top 0.406: U4.9 96.52,24.13 97.16,24.77 102.78,24.77 104.76,26.75 104.76,34.3 104.14,34.92
  Top 0.813: X3.2 77.47,63.5 79.38,61.59 99.69,61.59 104.14,57.15 104.14,34.92
RWHEEL_SPEED_3V3  (via drill 0.35)  (1 unrouted)
  Top 0.406: 84.48,26.64 85.72,25.4 v88.27,25.4 | v94.82,20.75 95.89,19.68 96.52,19.68 97.79,20.95 U4.10
  Bottom 0.406: v88.27,25.4 90.17,25.4 v94.82,20.75
SCK  (via drill 0.35)  (1 unrouted)
  Top 0.406: 146.05,35.56 146.05,46.99 138.43,54.61 131.73,54.61 XB1.18 118.03,54.53 v113.67,50.16 | U1.27 91.28,32.22 | 91.28,32.22 91.36,32.31 | 91.28,32.22 v91.24,32.18
  Bottom 0.406: v91.24,32.18 97.16,38.1 111.76,38.1 113.67,40.01 v113.67,50.16
SENC_INA  (via drill 0.35)
  Top 0.406: U$19.6 73.66,9.53 72.39,10.79 72.39,12.86 73.5,13.97 79.38,13.97 v79.38,14.07 | U4.5 100.32,27.86 100.32,26.75 99.04,25.48 96.6,25.48 85.09,13.97 v81.92,13.97
  Bottom 0.406: v79.38,14.07 79.47,13.97 v81.92,13.97
SENC_INA_3V3  (via drill 0.35)
  Top 0.406: U4.4 101.6,29.84 97.16,34.29 93.98,34.29 90.17,38.1 v89.53,38.1 | v88.89,36.2 86.92,36.2 U1.32
  Bottom 0.406: v89.53,38.1 89.53,36.83 88.9,36.2 v88.89,36.2
SENC_INB
  Top 0.406: U$19.8 74.3,10.79 73.66,11.43 73.66,12.18 74.53,13.04 79.72,13.04 81.92,15.24 85.09,15.24 95.89,26.04 96.52,26.04 97.79,27.3 U4.7
SENC_INB_3V3
  Top 0.406: U1.33 86.98,36.93 90.07,36.93 93.98,33.02 97.16,33.02 99.06,31.11 U4.6
SMOT_INA  (via drill 0.35)
  Top 0.406: R6.1 43.18,25.4 v46.99,21.59 | U5.9 68.64,28.57 v69.95,28.57
  Bottom 0.406: v69.95,28.57 73.03,25.5 73.03,24.13 69.85,20.95 47.62,20.95 v46.99,21.59
SMOT_INA_3V3  (via drill 0.35)  (1 unrouted)
  Top 0.406: U5.10 66.67,31.75 68.58,33.66 69.22,33.66 72.39,30.48 v72.36,30.45 | v76.2,27.3 77.18,27.3
  Bottom 0.406: v72.36,30.45 75.51,27.3 v76.2,27.3
SMOT_INB  (via drill 0.35)
  Top 0.406: R7.1 40.32,31.43 41.91,29.84 v54.61,29.84 | v65.41,29.84 U5.11
  Bottom 0.406: v54.61,29.84 v65.41,29.84
SMOT_INB_3V3  (via drill 0.35)
  Top 0.406: 78.08,26.64 76.83,25.4 71.75,25.4 v71.75,25.5 | v64.14,31.11 U5.12
  Bottom 0.406: v71.75,25.5 68.58,28.67 68.58,30.48 67.94,31.11 v64.14,31.11
SMOT_PWM  (via drill 0.35)
  Top 0.406: R8.1 45.72,29.21 54.61,20.32 v54.61,20.22 | v61.59,31.11 U5.14
  Bottom 0.406: v54.61,20.22 70.54,20.22 74.22,23.9 74.22,26.11 67.94,32.38 62.87,32.38 v61.59,31.11
SMOT_PWM_3V3  (via drill 0.35)
  Top 0.406: U5.15 60.33,33.02 60.96,33.66 v67.31,33.66 | v78.74,24.13 79.68,25.07 U1.15
  Bottom 0.406: v67.31,33.66 67.94,33.66 77.47,24.13 v78.74,24.13
SS  (1 unrouted)
  Top 0.406: XB1.17 132.25,52.53 135.25,49.53 137.79,49.53 140.97,46.35 140.97,40.64
TEENSY_RX  (1 unrouted)
TEENSY_TX  (1 unrouted)
VCC  (via drill 0.35)  (1 unrouted)
  Top 0.406: 73.66,30.48 75.53,30.48 U1.9 | v93.34,39.37 C7.1 94.24,41.85 95.89,43.5 JP1.2 | C6.1 | U1.31 89.39,35.42 v89.53,35.56
  Top 0.813: 68.58,47.31 C3.1 | L1.2 65.44,44.45 65.48,44.41 67.24,44.41 67.28,44.45 68.58,44.45 | C5.1 68.58,41.59 68.58,35.56 73.66,30.48 | U1.19 C6.1
  Top 1.219: C6.1 76.52,16.51 73.66,16.51 70.48,13.34 70.48,8.89 73.03,6.35 | 89.01,9.64 89.01,11.12 86.02,12.36 78.74,5.08 74.3,5.08 73.03,6.35 | U$19.2 74.3,6.35 73.03,6.35
  Bottom 0.406: v89.53,35.56 v93.34,39.37
  pour Top: 67.31,40.64 68.58,40.64 68.58,48.26 67.31,48.26
  pour Top: 74.93,31.11 74.93,29.84 77.47,29.84 78.74,28.57 81.92,28.57 81.92,26.67 83.82,26.67 83.82,29.21 85.72,31.11 85.72,34.92 87.63,34.92 87.63,36.2 80.64,36.2 76.83,32.38 76.83,31.11
XBEE_RX  (via drill 0.35)
  Top 0.406: U1.16 v80.48,23.02 | v113.67,56.52 109.67,56.52 XB1.2
  Bottom 0.406: v80.48,23.02 80.48,19.85 81.92,18.41 86.36,18.41 91.44,13.34 107.31,13.34 116.84,22.86 116.84,53.34 v113.67,56.52
XBEE_TX  (via drill 0.35)
  Top 0.406: U1.17 v81.28,24.13 | v111.84,54.53 XB1.3
  Bottom 0.406: v81.28,24.13 81.28,20.95 82.55,19.68 86.36,19.68 91.91,14.13 106.84,14.13 115.57,22.86 115.57,50.8 v111.84,54.53
XTAL1
  Top 0.406: U1.37 82.88,43 Q1.1 82.68,47.62 C9.1
XTAL2
  Top 0.406: U1.36 83.68,41.77 86.36,44.45 86.36,48.77 Q1.2 83.69,51.44 C10.1